# Altium PCB AirTHD.PcbDoc
Units mm, origin at the board's own origin, x right, y up, seen from the top; angles counter-clockwise.
Board outline 25.5 x 27.05 mm, 2 copper layers (Top Layer, Bottom Layer); 29 components, 49 nets, 170 pads, 72 vias.
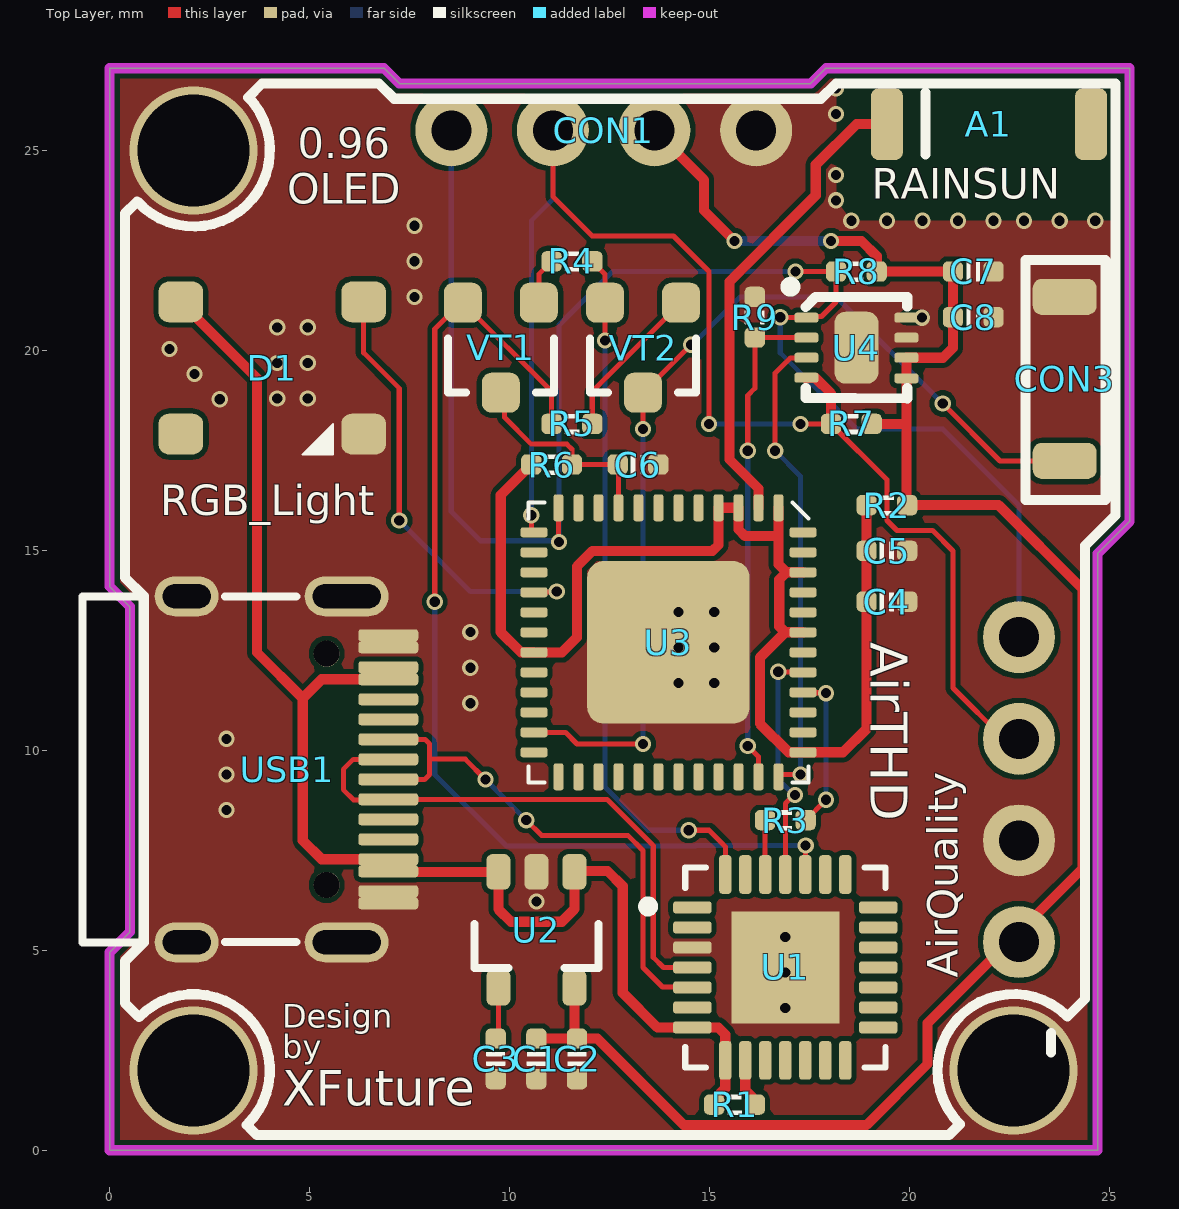
[diagram p0: Top Layer view]
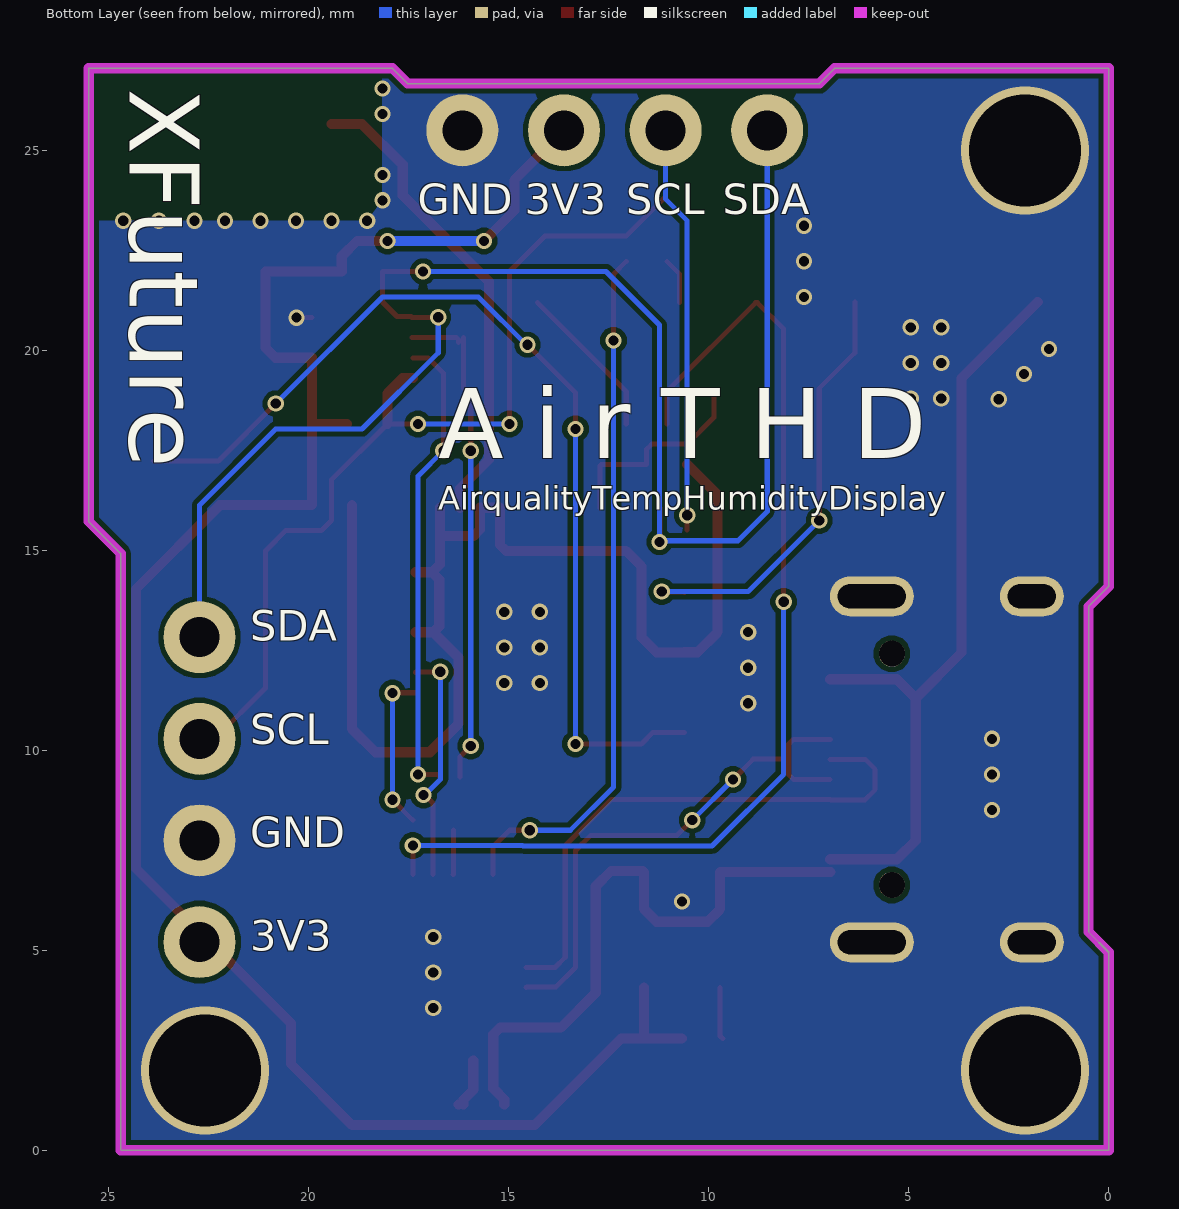
[diagram p1: Bottom Layer view, seen from below]
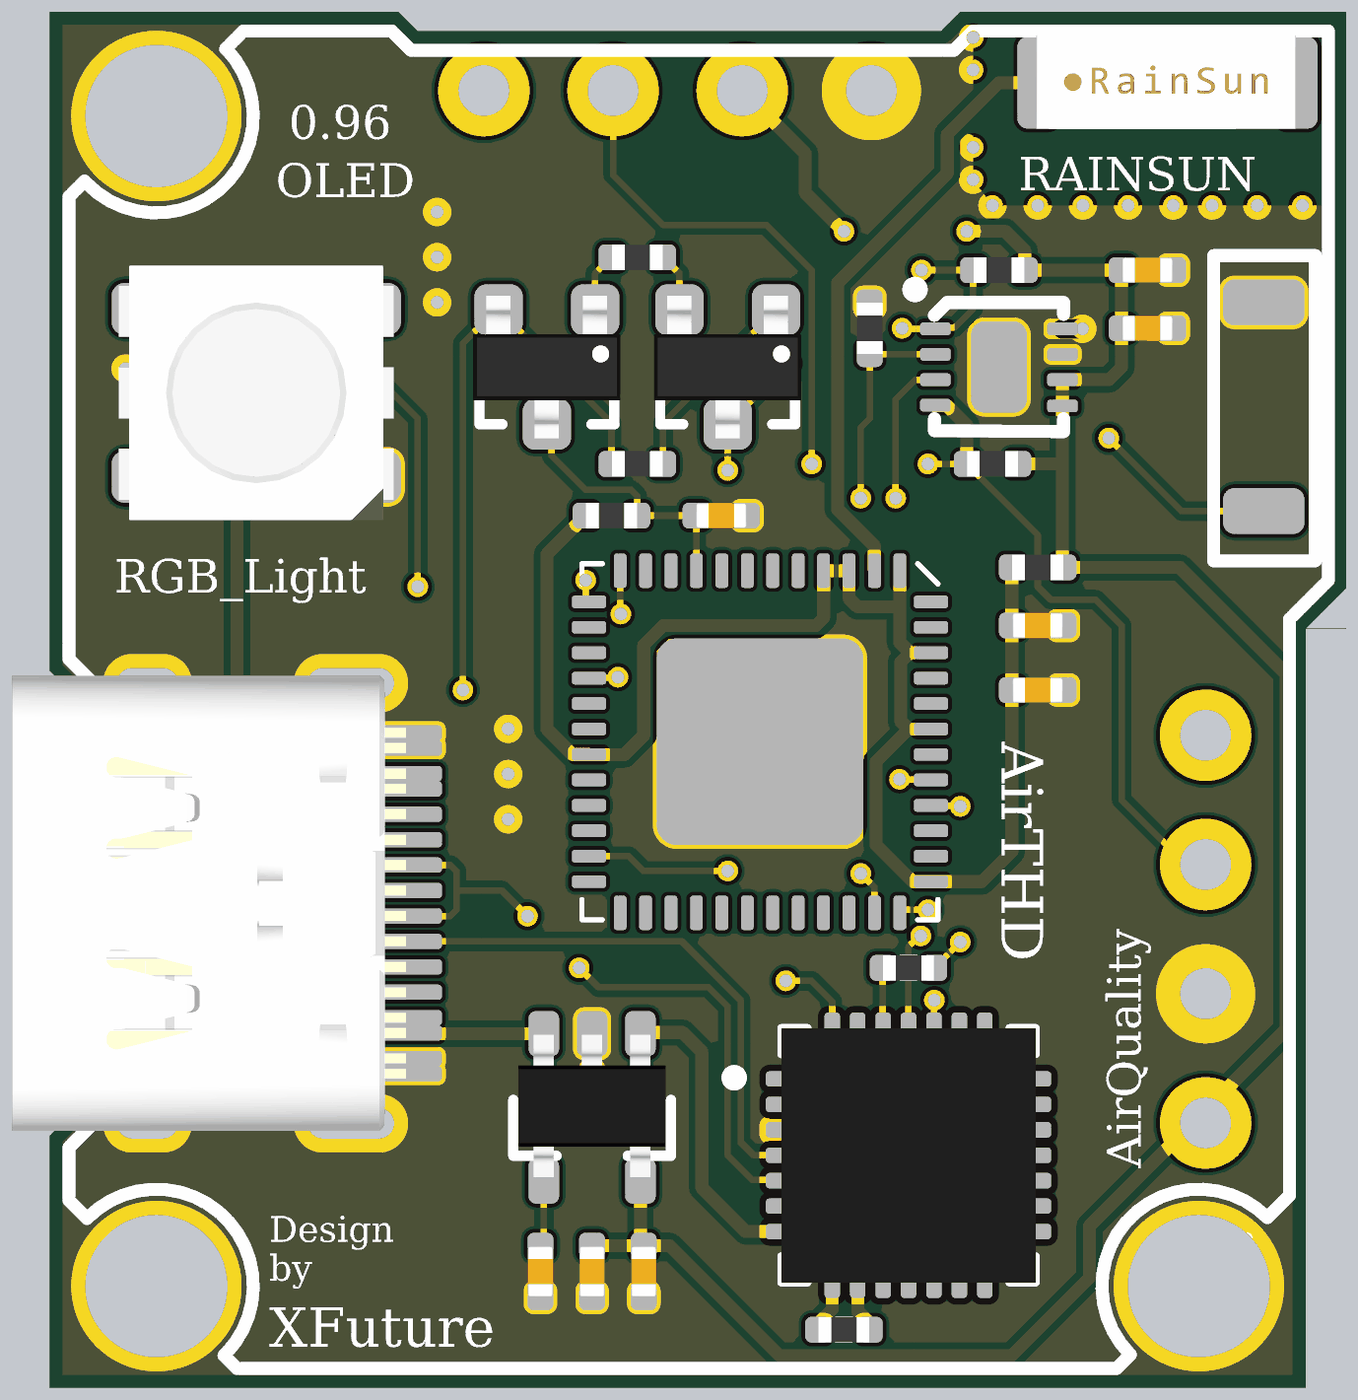
[diagram p2: 3D render of the assembled board from above, using the file's embedded part models]

## Layer stack, top to bottom
Top Solder: solder mask 0.0102, Solder Resist, Dk 3.5
Top Layer: signal copper 0.0356
Dielectric 1: dielectric 0.32, FR-4, Dk 4.8
Bottom Layer: signal copper 0.0356
Bottom Solder: solder mask 0.0102, Solder Resist, Dk 3.5

## Board outline
0,0 0,4.953 0.508,5.461 0.508,13.589 0,14.097 0,27.051 6.858,27.051 7.239,26.67 17.526,26.67 17.907,27.051 25.5,27.051 25.5,15.721 24.7,14.921 24.7,0

## Design rules (kind name [scope] priority, off if disabled: settings)
Clearance [All] p1: gap=0.127 ignorepadtopadclearanceinfootprint=FALSE
ComponentClearance [All] p1: gap=0 collisioncheckmode=3 verticalgap=0 showdistances=FALSE
DiffPairsRouting [All] p1: maxlimit=0.229 minlimit=0.229 mostfreqgap=0.229 toplayer_minwidth=0.102 toplayer_maxwidth=0.102 toplayer_prefwidth=0.102 bottomlayer_minwidth=0.102 bottomlayer_maxwidth=0.102 bottomlayer_prefwidth=0.102 maxuncoupledlength=12.7
FanoutControl Fanout_BGA [All] p1: bgadir=Out bgaviamode=Centered fanoutstyle=Auto fanoutdirection=Alternating viagrid=0.025 // Fanout_BGA (Default Rule)
HoleSize [All] p1: absolutevalues=TRUE maxlimit=254 minlimit=0.203 maxpercent=80.000 minpercent=20.000
MinimumSolderMaskSliver [All] p1 off: minsoldermaskwidth=0.051
PlaneClearance [All] p1: clearance=0.203
PlaneConnect [All] p1: planeconnectstyle=Direct reliefexpansion=0.508 reliefentries=4 reliefconductorwidth=0.254 reliefairgap=0.254
PolygonConnect [All] p1: connectstyle=Direct reliefconductorwidth=0.254 reliefentries=4 polygonreliefangle="90 Angle" airgapwidth=0.254
RoutingVias [All] p1: holewidth=0.203 width=0.406 viastyle="Through Hole" minholewidth=0.152 minwidth=0.305 maxholewidth=0.711 maxwidth=1.27
SilkToSilkClearance [All] p1: silktosilkclearance=0
SilkToSolderMaskClearance [IsPad] p1: minsilkscreentomaskgap=0 clearancetoexposedcopper=TRUE
SolderMaskExpansion [All] p1: expansion=0.076 istentingtop=FALSE
Width [All] p1: maxlimit=254 minlimit=0.102 preferedwidth=0.127
21 further rules are at their usual default settings.

## Components (designator, comment, footprint, x,y, rotation, side; value= is the part's Value field where it differs from the comment)
* "SGP30模块" 4Pin排针 22.733,9.017 r90 top
A1 "RAINSUN" ANT-Rainsun-AN5120 21.971,25.654 r0 top
C1 "0.1uF" CAP_0402 10.668,2.286 r90 top value=0.1u
C2 "10uF" CAP_0402 11.684,2.286 r90 top value=0.1u
C3 "10nF" CAP_0402 9.652,2.286 r90 top value=0.1u
C4 "10uF" CAP_0402 19.431,13.716 r180 top value=0.1u
C5 "0.1uF" CAP_0402 19.431,14.986 r180 top value=0.1u
C6 "0.1uF" CAP_0402 13.208,17.145 r0 top value=0.1u
C7 "0.1uF" CAP_0402 21.59,21.971 r180 top value=0.1u
C8 "4.7uF" CAP_0402 21.59,20.828 r180 top value=0.1u
CON1 "0.96_OLED" 4Pin排针 12.35,25.5 r180 top
CON3 "按钮" 3*4贴片按钮 23.749,19.431 r270 top
D1 "RGB" LED_5050_WS2812B 4.064,19.558 r0 top
R1 "10K" RES_0402 15.621,1.143 r0 top value=22R
R2 "0R" RES_0402 19.431,16.129 r180 top value=22R
R3 "200R" RES_0402 16.891,8.255 r180 top value=22R
R4 "12K" RES_0402 11.557,22.225 r180 top value=22R
R5 "12K" RES_0402 11.557,18.161 r0 top value=22R
R6 "10K" RES_0402 11.049,17.145 r0 top value=22R
R7 "10K" RES_0402 18.542,18.161 r0 top value=22R
R8 "10K" RES_0402 18.669,21.971 r0 top value=22R
R9 "10K" RES_0402 16.129,20.828 r270 top value=22R
U1 "CP2102" QFN-28 16.891,4.572 r0 top value=Value
U2 "LP2992 3V3" SOT23-5 10.668,5.461 r270 top
U3 "ESP32_SIP" QFN-48_7X7 13.97,12.7 r270 top
U4 "SHT30" SHT30 18.669,20.066 r0 top
USB1 "Type-C" Type-C-TOP 4.445,9.525 r180 top
VT1 "S8050" SMT_TRIODE_NPN 9.779,20.066 r180 top
VT2 "S8050" SMT_TRIODE_NPN 13.335,20.066 r180 top

## Footprints (in the part's own frame and the unit in brackets; to place one, negate y for a bottom-side part, rotate by r counter-clockwise, add the part's x,y. Pads: shape width x height; smd on the part's side, far side on the other; paste and mask are expansions set on the pad)
3*4贴片按钮 [mm]
  rrect50% 0.9x1.6 smd: 1(-1.905,0.127) 2(2.195,0.127)
  silkscreen extent -2.83,-0.86 3.17,1.14, body extent -2.79,-0.89 3.17,1.14, height 0.25
4Pin排针 [mm]
  round 1.8 hole 1: 1(-3.81,0) 2(-1.27,0) 3(1.27,0) 4(3.81,0)
  body extent -5.21,-1.27 5.21,1.27, height 0.25
ANT-Rainsun-AN5120 [mm]
  rrect50% 0.8x1.8 smd: 1(-2.54,0) ""(2.563,0)
  silkscreen extent -1.57,-0.76 -1.57,0.79, body extent -2.57,-0.91 2.54,0.94, height 1.32
CAP_0402 [mil]
  rrect50% 20x20 smd: 1(-20,0) 2(20,0)
  silkscreen extent -7,-9 7,9, body extent -20,-10 20,10, height 20
LED_5050_WS2812B [mil]
  rrect50% 44x40 smd: 1(-90,65) 2(-90,-65) 3(90,-65) 4(90,65)
  silkscreen extent 30,-85 60,-55, body extent -106,-98 106,98, height 69
QFN-28 [mil]
  rrect50% 38x12 smd mask+5: 1(-91.5,59.06) 2(-91.5,39.37) 3(-91.5,19.68) 4(-91.5,0) 5(-91.5,-19.68) 6(-91.5,-39.37) 7(-91.5,-59.06) 15(91.5,-59.06) 16(91.5,-39.37) 17(91.5,-19.68) 18(91.5,0) 19(91.5,19.68) 20(91.5,39.37) 21(91.5,59.06)
  rrect50% 12x38 smd mask+5: 8(-59.06,-91.5) 9(-39.37,-91.5) 10(-19.69,-91.5) 11(0,-91.5) 12(19.69,-91.5) 13(39.37,-91.5) 14(59.06,-91.5) 22(59.06,91.5) 23(39.37,91.5) 24(19.69,91.5) 25(0,91.5) 26(-19.69,91.5) 27(-39.37,91.5) 28(-59.06,91.5)
  rect 106.3x110.24 smd: 29(0,0)
  silkscreen extent -140,-98 98,98, body extent -98,-98 98,98, height 35
QFN-48_7X7 [mm]
  rrect20% 4.064x4.064 smd: 0(0,0)
  rrect50% 0.675x0.25 smd: 1(-3.362,2.75) 2(-3.362,2.25) 3(-3.363,1.75) 4(-3.363,1.25) 5(-3.363,0.75) 6(-3.362,0.25) 7(-3.362,-0.25) 8(-3.362,-0.75) 9(-3.362,-1.25) 10(-3.362,-1.75) 11(-3.363,-2.25) 12(-3.363,-2.75) 25(3.363,-2.75) 26(3.363,-2.25) 27(3.363,-1.75) 28(3.363,-1.25) 29(3.363,-0.75) 30(3.362,-0.25) 31(3.362,0.25) 32(3.363,0.75) 33(3.363,1.25) 34(3.363,1.75) 35(3.363,2.25) 36(3.363,2.75)
  rrect50% 0.25x0.675 smd: 13(-2.75,-3.363) 14(-2.25,-3.363) 15(-1.75,-3.363) 16(-1.25,-3.363) 17(-0.75,-3.363) 18(-0.25,-3.362) 19(0.25,-3.362) 20(0.75,-3.363) 21(1.25,-3.363) 22(1.75,-3.363) 23(2.25,-3.363) 24(2.75,-3.363) 37(2.75,3.363) 38(2.25,3.363) 39(1.75,3.362) 40(1.25,3.362) 41(0.75,3.362) 42(0.25,3.362) 43(-0.25,3.362) 44(-0.75,3.363) 45(-1.25,3.363) 46(-1.75,3.363) 47(-2.25,3.362) 48(-2.75,3.362)
  silkscreen extent -3.5,-3.5 3.5,3.5, body extent -3.5,-3.5 3.5,3.5, height 1
RES_0402 [mil]
  rrect50% 20x20 smd: 1(-20,0) 2(20,0)
  silkscreen extent -6,-10 6,10, body extent -20,-10 20,10, height 14
SHT30 [mm]
  rrect50% 0.6x0.25 smd: 1(-1.25,0.75) 2(-1.25,0.25) 3(-1.25,-0.25) 4(-1.25,-0.75) 5(1.25,-0.766) 6(1.25,-0.25) 7(1.25,0.25) 8(1.25,0.75)
  rrect50% 1.1x1.8 smd: 9(0,0)
  silkscreen extent -1.78,-1.27 1.27,1.65, body extent -1.27,-1.27 1.27,1.27, height 0.25
SMT_TRIODE_NPN [mm]
  rrect50% 0.95x1 smd: 1(-0.95,-1.125) 2(0.95,-1.125) 3(0,1.125)
  silkscreen extent -1.33,-0.22 1.32,1.13, body extent -1.45,-1.4 1.45,1.4, height 1.3
SOT23-5 [mm]
  rrect50% 0.889x0.6 smd: 1(-1.5,0.95) 2(-1.5,0) 3(-1.5,-0.95) 4(1.396,-0.95) 5(1.396,0.95)
  silkscreen extent -0.2,-1.55 0.9,1.55, body extent -1.48,-1.45 1.32,1.45, height 1.2
Type-C-TOP [mm]
  round 0.65 hole 0.65: 0(-0.98,2.89) 0(-0.98,-2.89)
  oval 1.6x1 hole 0.6 slot 1.2 at 0 deg: 1(2.52,4.325) 2(2.52,-4.325)
  oval 2.1x1 hole 0.6 slot 1.7 at 0 deg: 3(-1.48,-4.325) 4(-1.48,4.325)
  rrect50% 1.5x0.3 smd: A1(-2.52,-3.35) A4(-2.52,-2.55) A5(-2.52,-1.25) A6(-2.52,-0.25) A7(-2.52,0.25) A8(-2.52,1.25) A9(-2.52,2.55) A12(-2.52,3.35) B1(-2.52,3.05) B4(-2.52,2.25) B5(-2.52,1.75) B6(-2.52,0.75) B7(-2.52,-0.75) B8(-2.52,-1.75) B9(-2.52,-2.25) B12(-2.52,-3.05)
  silkscreen extent -0.22,-4.33 5.12,4.33, body extent -2.57,-4.48 5.18,4.48, height 3.26

## Part data
A1: library part ANT-Rainsun-AP5120
C1 C2 C3 C4 C5 C6 C7 C8: library part 电容-0402, "Capacitor"
D1: library part LED_5050_WS2812B, "LED", Type=5050
R1 R2 R3 R4 R5 R6 R7 R8 R9: library part 电阻-0402, "Resistor"
U1: "USB转TTL", MFG #1="SILICON LABS", PART DESC="SINGLE-CHIP USB TO UART BRIDGE, QFN28, RoHS.", PART NUMBER=CP2102, RefDes=RefDes, Type=DEV
U2: library part LP2992, "LDO"
U3: library part ESP32-PICO
USB1: library part USB-Type-C-TOP
VT1 VT2: library part SMT_TRIODE_NPN, "Surface mount NPN transistor, package SOT-23"

## Via types
v1: diameter 0.406, hole 0.254, Top Layer to Bottom Layer, 69 vias
v2: diameter 3.2, hole 2.8, Top Layer to Bottom Layer, 3 vias

## Nets (pads, with @x,y where several pads share a name; then routed paths per layer and width w, separated by ;. In a path a pad name is that pad's centre, name@x,y a point inside that pad or via, vN(x,y) a via of type N, cw(c..) or ccw(c..) an arc to the next point about the centre after c; other vN are vias at no path point)
3V3: *.1 C1.2 C2.2 C7.2 C8.2 CON1.2 R2.1 R7.2 R8.2 U2.5 U4.5 U4.6 | length 48.7
  Top Layer w0.254: C1.2 C2.2 ; U2.5 11.618,2.86 C2.2 ; CON1.2 14.859,24.261 14.859,23.495 v1(15.621,22.733) ; v1(18.034,22.733) 18.796,22.733 19.177,22.352 R8.2 C7.2 C8.2 21.082,20.066 20.832,19.816 U4.6 U4.5 19.919,18.161 ; R7.2 19.919,18.161 ; R2.1@19.919,16.129 19.919,18.161 ; R2.1 22.225,16.129 24.319,14.035 24.319,7.047 20.447,3.175 20.447,2.159 18.923,0.635 14.351,0.635 12.192,2.794 C2.2
  Bottom Layer w0.254: v1(15.621,22.733) v1(18.034,22.733)
3V3A: C4.2 C5.2 R2.2 R6.1 U3.1 U3.3 U3.4 U3.19 U3.37 U3.43 U3.46 | length 30.9
  Top Layer w0.254: R6.1 9.779,16.383 9.779,12.954 10.283,12.45 U3.19 10.61,12.448 10.859,12.448 10.861,12.446 11.303,12.446 11.684,12.827 11.684,14.599 12.071,14.986 15.071,14.986 15.22,15.135 U3.4 U3.3 15.72,15.522 15.886,15.356 16.72,15.356 ; U3.1 16.72,15.356 ; U3.43 16.89,12.95 ; U3.46 16.919,14.45 ; R2.2 C5.2 C4.2 18.923,10.541 18.332,9.95 16.974,9.95 16.256,10.668 16.256,12.316 16.89,12.95 ; 16.72,15.356 16.72,14.649 16.919,14.45 ; 16.89,12.95 16.741,13.099 16.741,14.272 16.919,14.45
ADDR: R9.2 U3.35 U4.2 | length 12.4
  Top Layer w0.127: v1(15.951,10.109) 16.22,9.84 U3.35 ; v1(15.951,17.488) 15.951,18.872 16.129,19.05 R9.2 ; R9.2@16.256,20.193 16.256,20.261 16.315,20.32 17.415,20.32 U4.2
  Bottom Layer w0.127: v1(15.951,10.109) v1(15.951,17.488)
Air_SCL: *.3 CON1.3 R7.1 U3.13 U4.4 | length 35.5
  Top Layer w0.127: U3.13@10.541,15.512 v1(10.541,15.875) ; CON1.3 11.08,23.845 12.065,22.86 14.097,22.86 14.986,21.971 v1(14.986,18.161) ; v1(17.272,18.161) R7.1 19.431,16.764 19.431,15.748 19.685,15.494 20.574,15.494 21.082,14.986 21.082,11.557 22.352,10.287 *.3
  Top Layer w0.254: U4.4@17.399,19.304 17.653,19.304 18.034,18.923 R7.1
  Bottom Layer w0.127: v1(10.541,15.875) 10.541,23.241 11.08,23.78 CON1.3 ; v1(14.986,18.161) v1(17.272,18.161)
Air_SDA: *.4 CON1.4 R8.1 U3.12 U4.1 | length 40.3
  Top Layer w0.127: v1@11.22,15.225 U3.12 ; v1@16.776,20.816 U4.1 17.446,20.843 17.795,20.843 18.161,21.209 R8.1 v1(17.145,21.971)
  Bottom Layer w0.127: CON1.4 8.54,15.971 9.271,15.24 11.205,15.24 v1(11.233,15.211) 11.233,20.631 12.573,21.971 v1(17.145,21.971) ; v1(16.764,20.828) 16.764,19.939 18.669,18.034 20.828,18.034 22.733,16.129 *.4
ALERT: U3.36 U4.3 | length 11.8
  Top Layer w0.127: v1(16.637,17.488) 16.637,19.431 17.018,19.812 U4.3@17.399,19.812 ; U3.36 16.781,9.398 v1(17.272,9.398)
  Bottom Layer w0.127: v1(16.637,17.488) 17.272,16.853 v1(17.272,9.398)
CP_Rx: U1.25 U3.41 | length 5.9
  Top Layer w0.127: v1(16.713,11.963) 16.72,11.957 17.326,11.957 U3.41 ; U1.25 16.891,8.673 v1@17.102,8.883
  Bottom Layer w0.127: v1(16.713,11.963) 16.713,9.272 v1@17.102,8.883
  other v1: 17.132,8.883
CP_Tx: R3.1 U3.40 | length 4
  Top Layer w0.127: U3.40 17.342,11.44 17.897,11.44 v1(17.907,11.43) ; R3.1 v1(17.907,8.763)
  Bottom Layer w0.127: v1(17.907,8.763) v1(17.907,11.43)
DTR: R4.1 U1.28 VT2.2 | length 17.6
  Top Layer w0.127: R4.1 12.385,21.905 VT2.2 v1(12.385,20.245) ; v1(14.478,8.001) 14.986,8.001 15.391,7.596 U1.28
  Bottom Layer w0.127: v1(12.385,20.245) 12.385,9.078 13.462,8.001 v1(14.478,8.001)
EN: C6.1 R6.2 U3.9 VT1.3 | length 5.1
  Top Layer w0.127: VT1.3@9.869,18.851 9.869,18.325 10.541,17.653 11.43,17.653 11.557,17.526 R6.2 C6.1 ; U3.9 C6.1@12.72,17.125
FLASH_CLK: U3.31
FLASH_CS: U3.25
FLASH_SD0: U3.27
FLASH_SD1: U3.33
FLASH_SD2: U3.30
FLASH_SD3: U3.32
GND: *.2 C1.1 C2.1 C3.1 C4.1 C5.1 C6.2 C7.1 C8.1 CON1.1 CON3.1 D1.3 R9.1 U1.3 U1.29 U2.2 U3.0 U4.7 U4.8 U4.9 USB1.1 USB1.2 USB1.3 USB1.4 USB1.A1 USB1.A12 USB1.B1 USB1.B12 | length 0.4
  Top Layer w0.127: U4.8@19.92,20.817 v1(20.309,20.817)
  other v1: 16.891,3.556 16.891,4.445 16.891,5.334 10.668,6.223 2.921,8.509 2.921,9.398 2.921,10.287 9.017,11.176 14.224,11.684 15.113,11.684 9.017,12.065 14.224,12.573 15.113,12.573 9.017,12.954 14.224,13.462 15.113,13.462 2.75,18.778 4.191,18.796 4.953,18.796 2.122,19.407 4.191,19.685 4.953,19.685 1.493,20.035 4.191,20.574 4.953,20.574 7.62,21.336 7.62,22.225 7.62,23.114 18.542,23.241 19.431,23.241 20.32,23.241 21.209,23.241 22.098,23.241 22.86,23.241 23.749,23.241 24.638,23.241 18.161,23.749 18.161,24.384 18.161,25.908 18.161,26.543
  other v2: 2.1,2 22.6,2 2.1,25
GPIO0: CON3.2 U3.23 VT2.3 | length 24.9
  Top Layer w0.127: U3.23 11.394,10.45 11.684,10.16 v1(13.335,10.16) ; v1(13.335,18.034) VT2.3 v1(14.534,20.14) ; v1(20.828,18.669) 22.261,17.236 CON3.2
  Bottom Layer w0.127: v1(13.335,10.16) v1(13.335,18.034) ; v1(14.534,20.14) 14.567,20.14 15.764,21.336 18.161,21.336 v1(20.828,18.669)
GPIO2: U3.22
GPIO4: U3.24
GPIO5: U3.34
GPIO9: U3.28
GPIO10: U3.29
GPIO12: U3.18
GPIO13: U3.20
GPIO14: U3.17
GPIO15: U3.21
GPIO19: U3.38
GPIO21: U3.42
GPIO22: U3.39
GPIO25: U3.14
GPIO26: U3.15
GPIO27: D1.4 U3.16 | length 11.1
  Top Layer w0.127: D1.4 6.35,19.939 7.239,19.05 v1(7.239,15.748) ; U3.16 10.617,13.96 11.166,13.96 v1(11.176,13.97)
  Bottom Layer w0.127: v1(7.239,15.748) 9.017,13.97 v1(11.176,13.97)
GPIO34: U3.10
GPIO35: U3.11
GPIO37: U3.6
GPIO38: U3.7
NetA1_1: A1.1 U3.2 | length 12
  Top Layer w0.254: U3.2 16.22,16.546 15.494,17.272 15.494,21.717 17.653,23.876 17.653,24.638 18.669,25.654 A1.1
NetC3_2: C3.2 U2.4 | length 1.3
  Top Layer w0.127: C3.2 9.718,2.86 U2.4
NetR1_2: R1.2 U1.9 | length 1.2
  Top Layer w0.254: U1.9@15.895,2.244 U1.9 15.891,1.508 16.129,1.27 R1.2
NetR3_2: R3.2 U1.26 | length 1.1
  Top Layer w0.127: R3.2@16.383,8.001 16.383,6.904 U1.26
NetR4_2: R4.2 VT1.1 | length 1.2
  Top Layer w0.127: VT1.1 10.729,21.905 R4.2
NetR5_2: R5.2 VT2.1 | length 3.9
  Top Layer w0.127: R5.2 12.065,18.971 VT2.1
RTS: R5.1 U1.24 VT1.2 | length 26.8
  Top Layer w0.127: v1(8.128,13.716) 8.128,20.532 VT1.2@8.787,21.191 ; VT1.2 11.049,18.971 R5.1 ; U1.24 17.395,6.9 17.395,7.616 v1(17.399,7.62)
  Bottom Layer w0.127: v1(8.128,13.716) 8.128,9.398 9.919,7.607 14.641,7.607 14.654,7.62 v1(17.399,7.62)
SENSOR_VN: U3.8
SENSOR_VP: U3.5
USB-PWR-DM: U1.5 USB1.A7 USB1.B7 | length 13.6
  Top Layer w0.127: USB1.B7 7.886,10.275 8.001,10.16 8.001,9.779 ; USB1.A7@6.969,9.271 7.874,9.271 8.001,9.398 8.001,9.779 ; v1(9.398,9.271) 8.89,9.779 8.001,9.779 ; v1(10.414,8.255) 10.795,7.874 12.954,7.874 13.335,7.493 13.335,4.572 13.824,4.083 14.556,4.083 U1.5
  Bottom Layer w0.127: v1(9.398,9.271) v1(10.414,8.255)
USB-PWR-DP: U1.4 USB1.A6 USB1.B6 | length 13.9
  Top Layer w0.127: USB1.B6@6.953,8.763 6.096,8.763 5.842,9.017 5.842,9.525 6.092,9.775 USB1.A6 ; USB1.B6 12.434,8.775 13.589,7.62 13.589,4.826 13.843,4.572 U1.4
VDD_5V: D1.1 R1.1 U1.7 U1.8 U2.1 U2.3 USB1.A4 USB1.A9 USB1.B4 USB1.B9 | length 35
  Top Layer w0.254: D1.1 3.683,19.304 3.683,12.446 4.826,11.303 ; USB1.A9@6.965,6.961 U2.3 9.718,6.03 10.033,5.715 11.303,5.715 11.618,6.03 U2.1 ; USB1.B4 5.298,7.275 4.826,7.747 4.826,11.303 ; USB1.B9 5.298,11.775 4.826,11.303 ; U2.1@11.642,6.985 12.446,6.985 12.827,6.604 12.827,3.937 13.692,3.072 U1.7 15.216,3.072 15.391,2.897 U1.8 15.391,1.548 15.113,1.27 R1.1
pads on no net: A1. D1.2 U1.1 U1.2 U1.6 U1.10 U1.11 U1.12 U1.13 U1.14 U1.15 U1.16 U1.17 U1.18 U1.19 U1.20 U1.21 U1.22 U1.23 U1.27 U3.26 U3.44 U3.45 U3.47 U3.48 USB1.0 USB1.A5 USB1.A8 USB1.B5 USB1.B8

## Polygon pours and split planes (outlines as drawn)
GND on Bottom Layer "GND_L02_P000" (solid, remove dead copper, pour order 0): 0,27.051 25.527,27.051 25.527,0 0,0
GND on Top Layer "GND_L01_P002" (solid, remove dead copper, pour order 2): 0,27.051 25.527,27.051 25.527,0 0,0

## Keep-outs
Keep-Out Layer:
  the board outline again, w0.254

## Other copper
Top Layer:
  pour cut-out: 25.654,23.241 18.542,23.241 18.161,23.749 18.161,27.242 25.654,27.242
Bottom Layer:
  pour cut-out: 25.654,23.241 18.542,23.241 18.161,23.749 18.161,27.242 25.654,27.242

## Silkscreen, mask and mechanical layers (free items; w line width, h text height)
Top Overlay:
  lines w0.254: 0.735,3.329 cw(c2.1,2) 3.429,0.635 ; 0.753,3.347 0.717,3.347 0.381,3.683 0.381,4.728 0.853,5.2 0.853,13.85 0.381,14.322 0.381,14.605 0.381,23.368 0.381,23.416 0.687,23.722 ccw(c2.1,25) 3.467,26.327 ; 3.461,26.321 3.81,26.67 6.731,26.67 7.112,26.289 17.399,26.289 17.526,26.289 17.78,26.289 18.161,26.67 25.146,26.67 25.146,22.352 25.146,15.875 24.384,15.113 24.384,3.784 23.947,3.347 ccw(c22.6,2) 21.24,0.666 ; 3.483,0.617 3.483,0.581 3.683,0.381 20.981,0.381 21.253,0.653 ; 23.533,2.451 23.533,2.933
  text "0.96" at 4.699,24.552 h1.3
  text "RAINSUN" at 19.05,23.536 h1.3
  text "OLED" at 4.445,23.409 h1.3
  text "RGB_Light" at 1.27,15.629 h1.3
  text "AirTHD" at 18.719,12.7 h1.6 r270
  text "AirQuality" at 21.455,4.318 h1.3 r90
  text "Design" at 4.318,2.869 h1
  text "by" at 4.318,2.107 h1
  text "XFuture" at 4.318,0.81 h1.52
Bottom Overlay:
  text "XFuture" at 25.054,26.543 h3 r90
  text "SDA" at 9.652,23.155 h1.3
  text "SCL" at 12.065,23.155 h1.3
  text "3V3" at 14.605,23.155 h1.3
  text "GND" at 17.272,23.155 h1.3
  text "A i r T H D" at 16.764,16.729 h3
  text "AirqualityTempHumidityDisplay" at 16.764,15.819 h1
  text "SDA" at 21.463,12.487 h1.3
  text "SCL" at 21.463,9.905 h1.3
  text "GND" at 21.463,7.322 h1.3
  text "3V3" at 21.463,4.74 h1.3